# Altium PCB 89c51.PcbDoc
Units mil, origin at the board's own origin, x right, y up, seen from the top; angles counter-clockwise.
Board outline 6000 x 4000 mil, 2 copper layers (Top Layer, Bottom Layer); 22 components, 15 nets, 124 pads, 0 vias.
Unrouted connection lines stored in the file: 2.
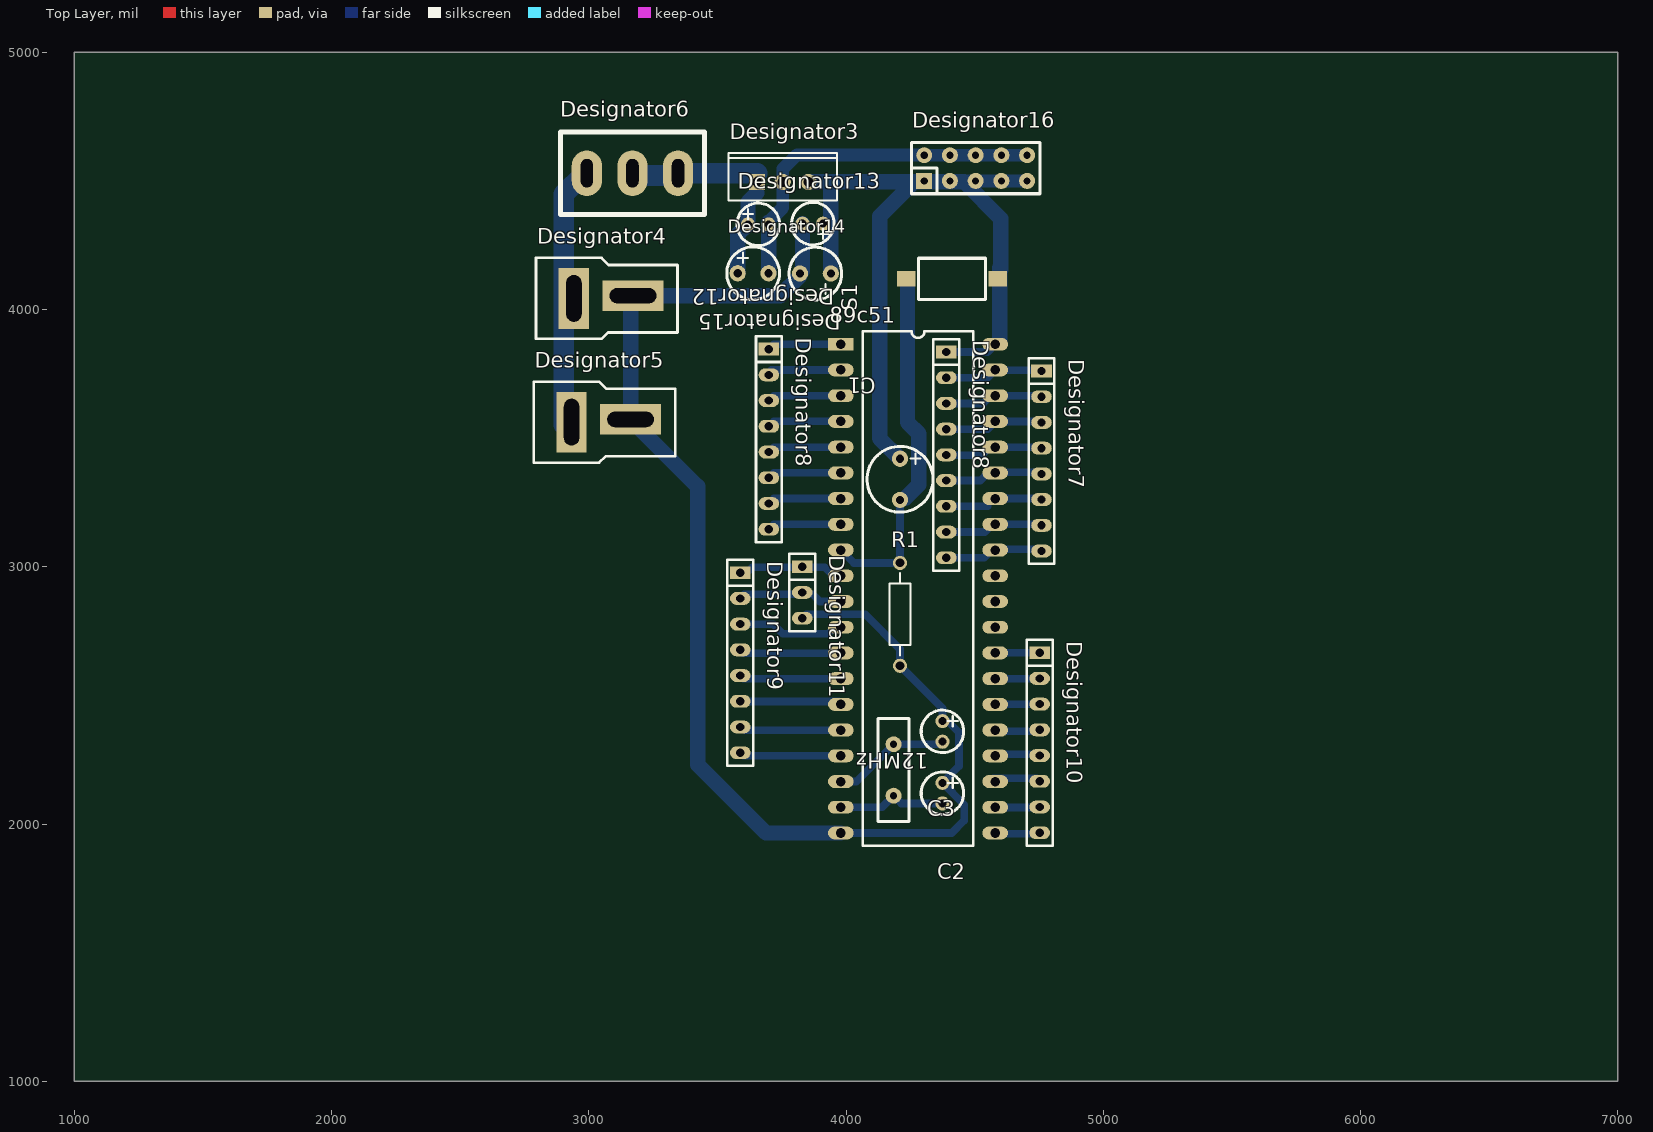
[diagram p0: Top Layer view]
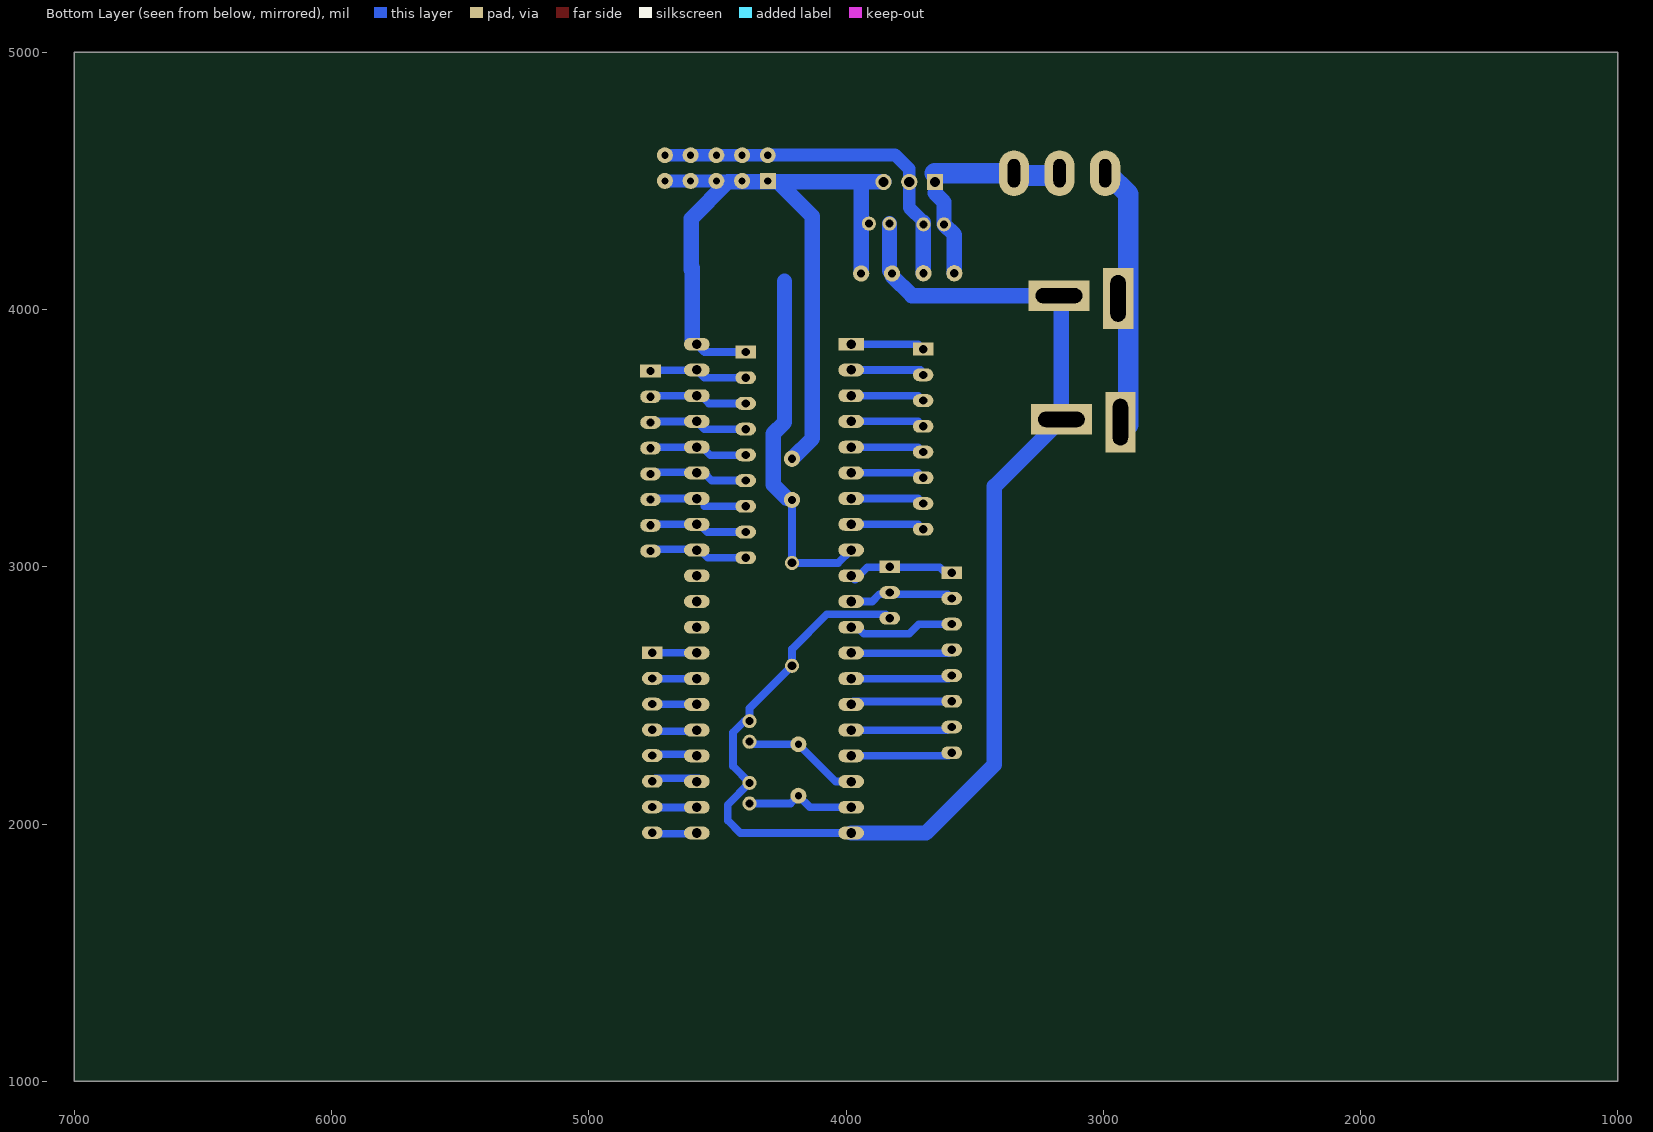
[diagram p1: Bottom Layer view, seen from below]

## Layer stack, top to bottom
Top Solder: solder mask 0.4, Solder Resist, Dk 3.5
Top Layer: signal copper 1.4
Dielectric 1: dielectric 12.6, FR-4, Dk 4.8
Bottom Layer: signal copper 1.4
Bottom Solder: solder mask 0.4, Solder Resist, Dk 3.5

## Board outline
1000,1000 7000,1000 7000,5000 1000,5000

## Design rules (kind name [scope] priority, off if disabled: settings)
Clearance [All] p1: gap=10 ignorepadtopadclearanceinfootprint=FALSE except(0: Arc-Hole Track-Hole SMDPad-Hole THPad-Hole Via-Hole Fill-Hole Poly-Hole Region-Hole Text-Hole)
ComponentClearance [All] p1: gap=0 collisioncheckmode=3 verticalgap=0 showdistances=FALSE
PolygonConnect [All] p1: connectstyle=Relief reliefconductorwidth=10 reliefentries=4 polygonreliefangle="90 Angle" airgapwidth=10
RoutingVias [All] p1: holewidth=28 width=50 viastyle="Through Hole" minholewidth=28 minwidth=50 maxholewidth=28 maxwidth=50
SolderMaskExpansion [All] p1: expansion=4
Width [All] p1: maxlimit=100 minlimit=10 preferedwidth=30
29 further rules are at their usual default settings.

## Classes and differential pairs
component class xiaoche: 12MHz 89c51 C1 C2 C3 R1 S1

## Components (designator, comment, footprint, x,y, rotation, side; value= is the part's Value field where it differs from the comment)
12MHz "XTAL" XTAL1 4185,2110 r90 top
89c51 "89c51" "stc-89c51 - duplicate" 3980,3865 r0 top
C1 "" EC-6mm 4210,3340 r270 top
C2 "" EC-4mm 4375,2120 r270 top
C3 "" EC-4mm 4375,2360 r270 top
Designator3 "Comment" T03B 3754,4496 r0 top
Designator4 "Comment" T插头(公头) 2784.83,3880.77 r0 top
Designator5 "Comment" T插头(公头) 2775.52,3399.52 r0 top
Designator6 "Comment" 钮子开关 2889.83,4370 r0 top
Designator7 "Comment" SIP8 4760,3761 r270 top
Designator8 "Comment" SIP9 4390,3835 r270 top
Designator8 "Comment" SIP8 3700,3846 r270 top
Designator9 "Comment" SIP8 3589,2977 r270 top
Designator10 "Comment" SIP8 4753,2666 r270 top
Designator11 "Comment" SIP3 3830,3000 r270 top
Designator12 "Comment" EC-4mm 3871,4334 r180 top
Designator13 "Comment" EC-4mm 3659,4331 r0 top
Designator14 "Comment" EC-5mm 3639,4141 r0 top
Designator15 "Comment" EC-5mm 3881,4140 r180 top
Designator16 "Comment" IDC10 4304,4500 r0 top
R1 "" AXIAL-0.4 4210,2815 r90 top
S1 "SW-PB" 按键6X3贴片 4279,4045 r0 top

## Footprints (in the part's own frame and the unit in brackets; to place one, negate y for a bottom-side part, rotate by r counter-clockwise, add the part's x,y. Pads: shape width x height; smd on the part's side, far side on the other; paste and mask are expansions set on the pad)
AXIAL-0.4 [mm] "Axial Device, Thru-Hole; 2 Leads; 0.4 in Pin Spacing"
  round 1.4 hole 0.85: 1(-5.08,0) 2(5.08,0)
  silkscreen extent -4.06,-1.02 4.06,1.02
EC-4mm [mm]
  round 1.4 hole 0.8 unplated: 1(-1.016,0) 2(1.016,0)
  silkscreen extent -2.1,-2.1 2.1,2.1
EC-5mm [mm]
  round 1.6 hole 0.8 unplated: 1(-1.524,0) 2(1.524,0)
  silkscreen extent -2.6,-2.6 2.6,2.6
EC-6mm [mm]
  round 1.6 hole 0.8 unplated: 1(-2.032,0) 2(2.032,0)
  silkscreen extent -3.25,-3.25 3.25,3.25
IDC10 [mil]
  rect 62x62 hole 28: 1(0,0)
  round 62 hole 28: 2(0,100) 3(100,0) 4(100,100) 5(200,0) 6(200,100) 7(300,0) 8(300,100) 9(400,0) 10(400,100)
  silkscreen extent -50,-50 450,150
SIP3 [mil]
  rect 50x80 hole 32: 1(0,0)
  oval 50x80 hole 32: 2(100,0) 3(200,0)
  silkscreen extent -50,-50 250,50
SIP8 [mil]
  rect 50x80 hole 32: 1(0,0)
  oval 50x80 hole 32: 2(100,0) 3(200,0) 4(300,0) 5(400,0) 6(500,0) 7(600,0) 8(700,0)
  silkscreen extent -50,-50 750,50
SIP9 [mil]
  rect 50x80 hole 32: 1(0,0)
  oval 50x80 hole 32: 2(100,0) 3(200,0) 4(300,0) 5(400,0) 6(500,0) 7(600,0) 8(700,0) 9(800,0)
  silkscreen extent -50,-50 850,50
"stc-89c51 - duplicate" [mil]
  rect 100x50 hole 37: 1(0,0)
  oval 100x50 hole 37: 2(0,-100) 3(0,-200) 4(0,-300) 5(0,-400) 6(0,-500) 7(0,-600) 8(0,-700) 9(0,-800) 10(0,-900) 11(0,-1000) 12(0,-1100) 13(0,-1200) 14(0,-1300) 15(0,-1400) 16(0,-1500) 17(0,-1600) 18(0,-1700) 19(0,-1800) 20(0,-1900) 21(600,-1900) 22(600,-1800) 23(600,-1700) 24(600,-1600) 25(600,-1500) 26(600,-1400) 27(600,-1300) 28(600,-1200) 29(600,-1100) 30(600,-1000) 31(600,-900) 32(600,-800) 33(600,-700) 34(600,-600) 35(600,-500) 36(600,-400) 37(600,-300) 38(600,-200) 39(600,-100) 40(600,0)
  silkscreen extent 85,-1950 515,50
T03B [mm] "TO, Thru-Hole, Vertical, Heatsink Mounted; 3 In-Line Leads; Pitch 2.54 mm"
  rect 1.6x1.6 hole 1: 1(-2.54,0)
  round 1.6 hole 1: 2(0,0) 3(2.54,0)
  silkscreen extent -5.35,-1.85 5.35,2.85
T插头(公头) [mm]
  rect 3x6 hole 1.5 slot 4.6 at 90 deg: 1(4,4.127)
  rect 6x3 hole 1.5 slot 4.6 at 0 deg: 2(9.834,4.4)
  silkscreen extent 0.25,0.13 14.22,8.13
XTAL1 [mil]
  round 62 hole 28: 1(0,0) 2(200,0)
  silkscreen extent -100,-60 300,60
按键6X3贴片 [mm]
  rect 1.8x1.5 smd: 1(7.908,1.888) 2(-1.141,1.888)
  silkscreen extent 0.08,-0.14 6.68,3.92
钮子开关 [mm]
  oval 3x4.5 hole 1.2 slot 2.8 at 90 deg: 1(2.612,4.064) 2(7.112,4.064) 3(11.612,4.064)
  silkscreen extent 0,0 14.22,8.13

## Part data
12MHz: "Crystal Oscillator"
C1: library part "Cap Pol1", "Polarized Capacitor (Radial)"
C2 C3: library part Cap, "Capacitor"
R1: library part Res2, "Resistor"
S1: "Switch"

## Nets (pads, with @x,y where several pads share a name; then routed paths per layer and width w, separated by ;. In a path a pad name is that pad's centre, name@x,y a point inside that pad or via, vN(x,y) a via of type N, cw(c..) or ccw(c..) an arc to the next point about the centre after c; other vN are vias at no path point)
GND: 89c51.20 C2.1 C3.1 Designator4.2 Designator5.2 Designator11.3 Designator12.2 Designator15.2 R1.1 | length 5244.4
  Bottom Layer w30: Designator15.2 Designator15.2@3831,4150 ; Designator11.3 3845,2815 4075,2815 4210,2680 R1.1 4375,2450 C3.1 4395,2400 4439,2356 4439,2224 C2.1 4460,2075 4460,2014 4411,1965 89c51.20
  Bottom Layer w60: Designator4.2@3162.69,4044.69 Designator5.2 3423,3312.43 3423,2231 3689,1965 89c51.20 ; Designator4.2 3744,4054 Designator15.2@3821,4131 ; Designator15.2@3831,4150 Designator12.2
Net12MHz_1: 12MHz.1 89c51.19 C2.2 | length 426.1
  Bottom Layer w30: 89c51.19 4140,2065 12MHz.1 4215,2080 C2.2
Net12MHz_2: 12MHz.2 89c51.18 C3.2 | length 459.2
  Bottom Layer w30: 89c51.18 4040,2165 12MHz.2 4365,2310 C3.2
Net89c51_1: 
Net89c51_2: 
Net89c51_3: 
Net89c51_4: 
Net89c51_9: 89c51.9 C1.2 R1.2 S1.2 | length 1402.4
  Bottom Layer w30: 89c51.9 4030,3015 R1.2 C1.2 4216,3266 C1.2@4230,3266
  Bottom Layer w60: C1.2@4230,3266 4283,3319 4283,3517 4239,3561 4239,4110
Net89c51_34: 
Net89c51_35: 
Net89c51_36: 
Net89c51_37: 
Net89c51_38: 
Net89c51_39: 
VCC: 89c51.40 C1.1 Designator3.3 Designator8.1@4390,3835 Designator12.1 Designator15.1 Designator16.1 Designator16.3 Designator16.5 Designator16.7 Designator16.9 S1.1 | length 3676.3
  Bottom Layer w30: 4262,4493 4462,4493 Designator16.5@4511,4493 ; Designator8.1@4390,3835 4550,3835 89c51.40
  Bottom Layer w40: 89c51.40 89c51.40@4598,3883
  Bottom Layer w50: Designator16.1 Designator16.3 Designator16.5 Designator16.7 Designator16.9
  Bottom Layer w60: Designator3.3 3937,4496 3937,4491 3941,4487 Designator15.1 ; 3941,4496 4459,4496 4462,4493 4601,4354 4601,4154 ; C1.1 4131,3499 4131,4362 4262,4493 ; 89c51.40@4598,3883 4598,4163
pads on no net: 89c51.1 89c51.2 89c51.3 89c51.4 89c51.5 89c51.6 89c51.7 89c51.8 89c51.10 89c51.11 89c51.12 89c51.13 89c51.14 89c51.15 89c51.16 89c51.17 89c51.21 89c51.22 89c51.23 89c51.24 89c51.25 89c51.26 89c51.27 89c51.28 89c51.29 89c51.30 89c51.31 89c51.32 89c51.33 89c51.34 89c51.35 89c51.36 89c51.37 89c51.38 89c51.39 Designator3.1 Designator3.2 Designator4.1 Designator5.1 Designator6.1 Designator6.2 Designator6.3 Designator7.1 Designator7.2 Designator7.3 Designator7.4 Designator7.5 Designator7.6 Designator7.7 Designator7.8 Designator8.1@3700,3846 Designator8.2 Designator8.3 Designator8.4 Designator8.5 Designator8.6 Designator8.7 Designator8.8 Designator8.9 Designator9.1 Designator9.2 Designator9.3 Designator9.4 Designator9.5 Designator9.6 Designator9.7 Designator9.8 Designator10.1 Designator10.2 Designator10.3 Designator10.4 Designator10.5 Designator10.6 Designator10.7 Designator10.8 Designator11.1 Designator11.2 Designator13.1 Designator13.2 Designator14.1 Designator14.2 Designator16.2 Designator16.4 Designator16.6 Designator16.8 Designator16.10
copper on no net: | length 12718.5
  Bottom Layer w30: 2984,4530 2992.67,4530 ; 3589,2777 3717,2777 3754,2740 3861,2740 3931,2740 3953,2762 ; 3589,2877 3605,2893 3870,2893 3898,2865 3980,2865 ; 3589,2977 3614,2977 3635,2998 3917,2998 3965,2950 ; 3590,2476 3972,2476 ; 3600,2664 3970,2664 ; 3601,2265 3980,2265 ; 3601,2565 3980,2565 ; 3607,2365 3980,2365 ; 3654,4453 3654,4529 ; 3699,4331 3699,4341 ; 3710,3765 3980,3765 ; 3719,3165 3980,3165 ; 3719,3265 3980,3265 ; 3719,3365 3980,3365 ; 3719,3465 3980,3465 ; 3719,3665 3988,3665 ; 3719,3865 3980,3865 ; 3720,3566 3971,3566 ; 4303,4601 4304,4600 ; 4390,3035 4537,3035 4574,3072 ; 4390,3135 4539,3135 4571,3167 ; 4390,3235 4550,3235 ; 4390,3335 4522,3335 4552,3365 4562,3365 ; 4390,3535 4550,3535 4580,3565 4756,3565 ; 4390,3635 4534,3635 4564,3665 ; 4390,3735 4550,3735 4580,3765 ; 4401,3433 4528,3433 4567,3472 ; 4573,2178 4741,2178 ; 4574,2271 4758,2271 ; 4580,2465 4752,2465 ; 4580,2565 4752,2565 ; 4580,3165 4756,3165 ; 4580,3265 4756,3265 ; 4580,3465 4737,3465 4741,3461 ; 4580,3665 4756,3665 ; 4588,1962 4749,1962 ; 4588,2361 4748,2361 ; 4590,2666 4753,2666 ; 4590,3068 4753,3068 ; 4590,3367 4754,3367 ; 4590,3764 4757,3764 ; 4592,2064 4751,2064
  Bottom Layer w50: 3699,4341 3754,4396 3754,4546 3809,4601 4303,4601 ; 4304,4600 4704,4600
  Bottom Layer w60: 3579,4141 3579,4291 3619,4331 3619,4418 3654,4453 ; 3699,4141 3699,4339
  Bottom Layer w80: 2902,3552 2902,4448 2984,4530 ; 3178.83,4521 3356,4521 3364,4529 3654,4529